# Altium PCB top.PcbDoc
Units mm, origin at the board's own origin, x right, y up, seen from the top; angles counter-clockwise.
Board outline 100 x 100 mm, 2 copper layers (Top Layer, Bottom Layer); 18 components, 10 nets, 131 pads, 1 vias.
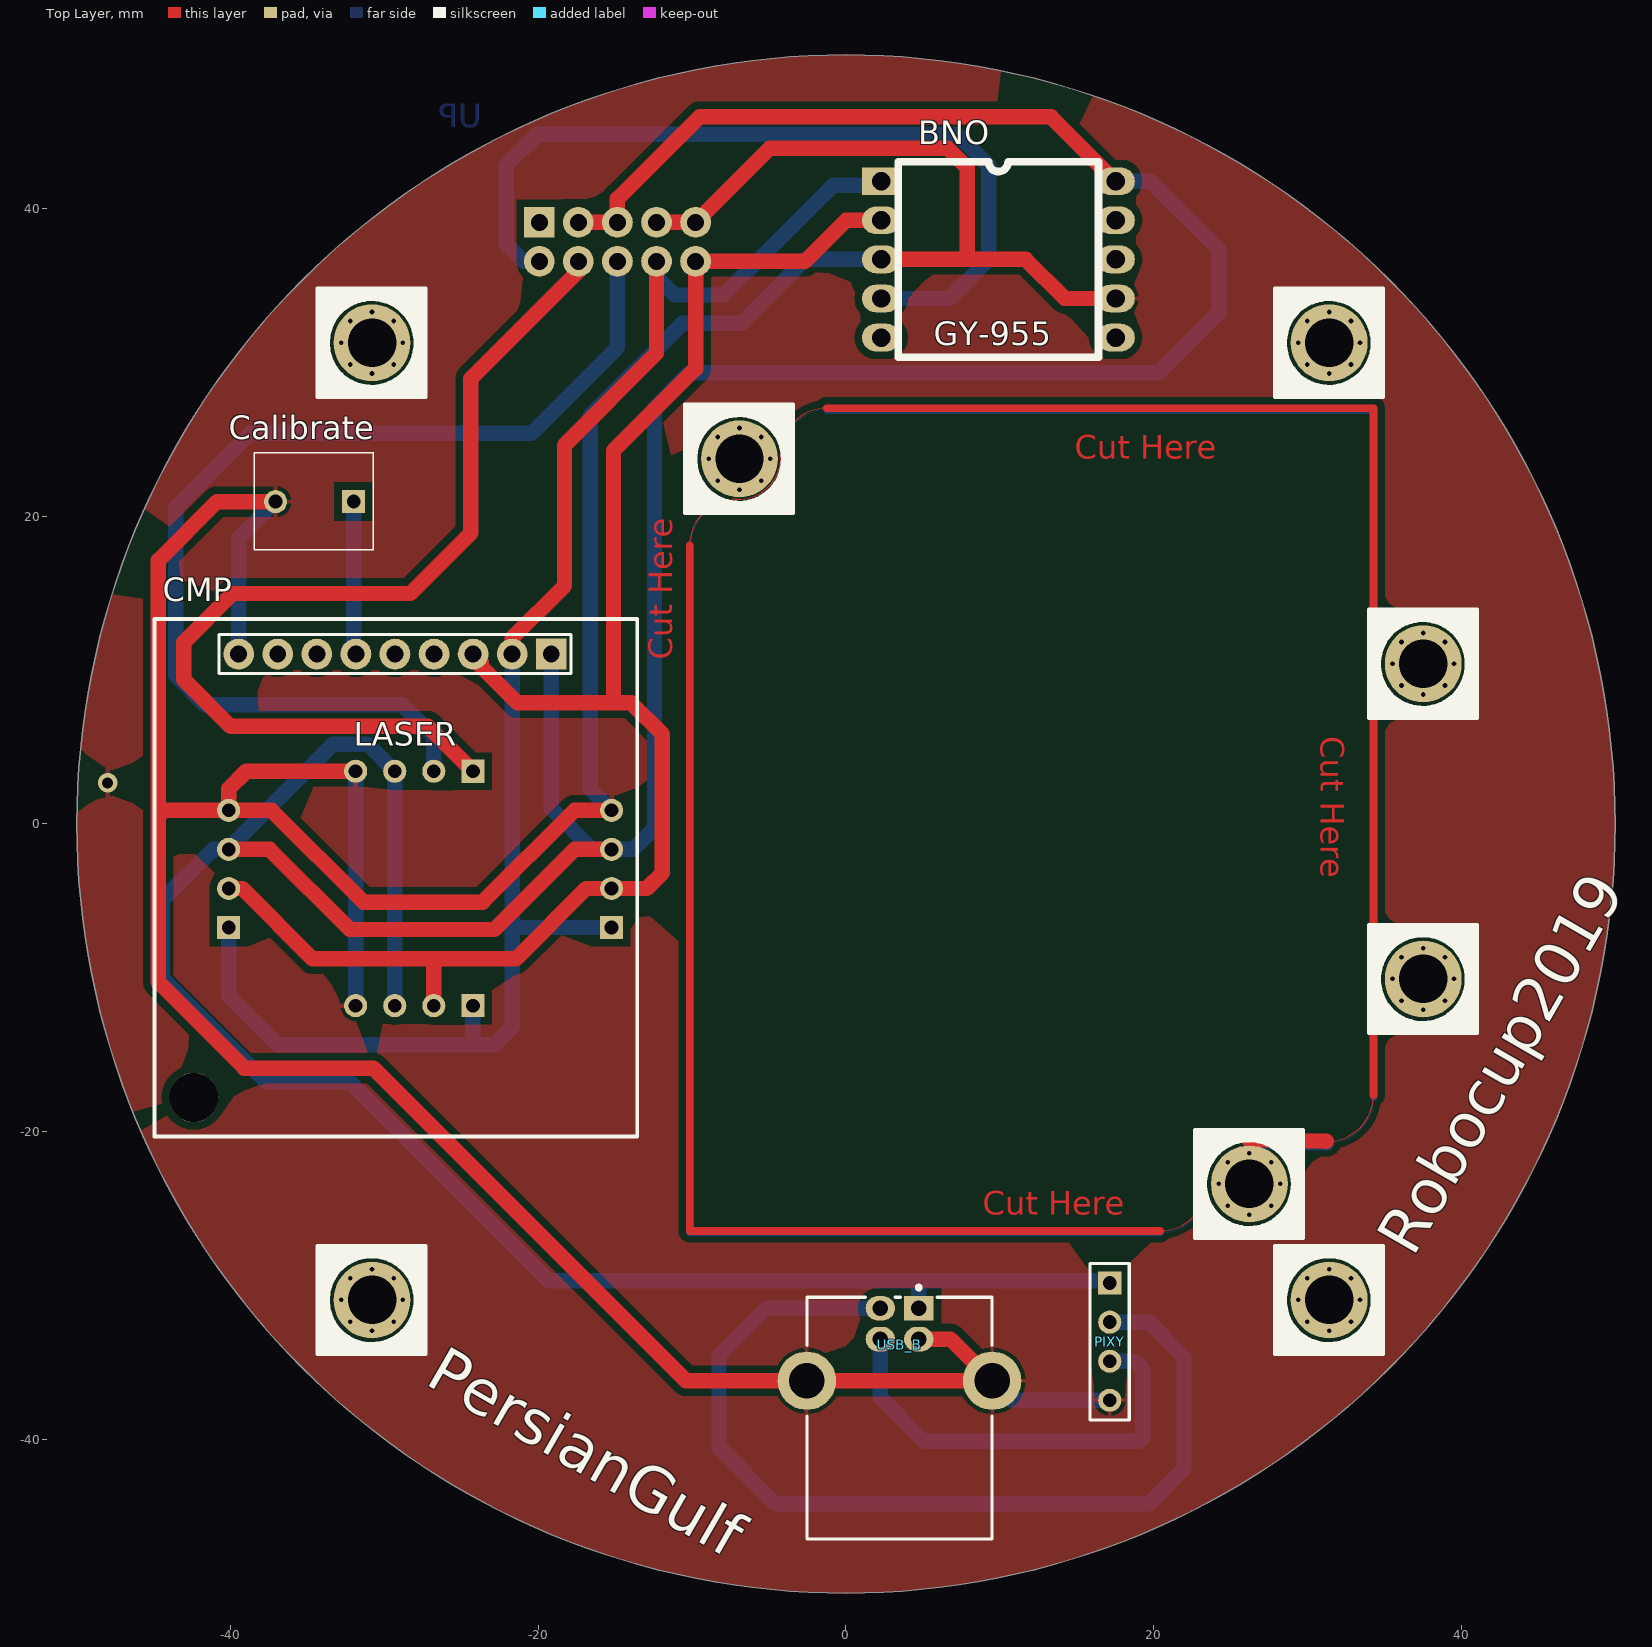
[diagram p0: Top Layer view]
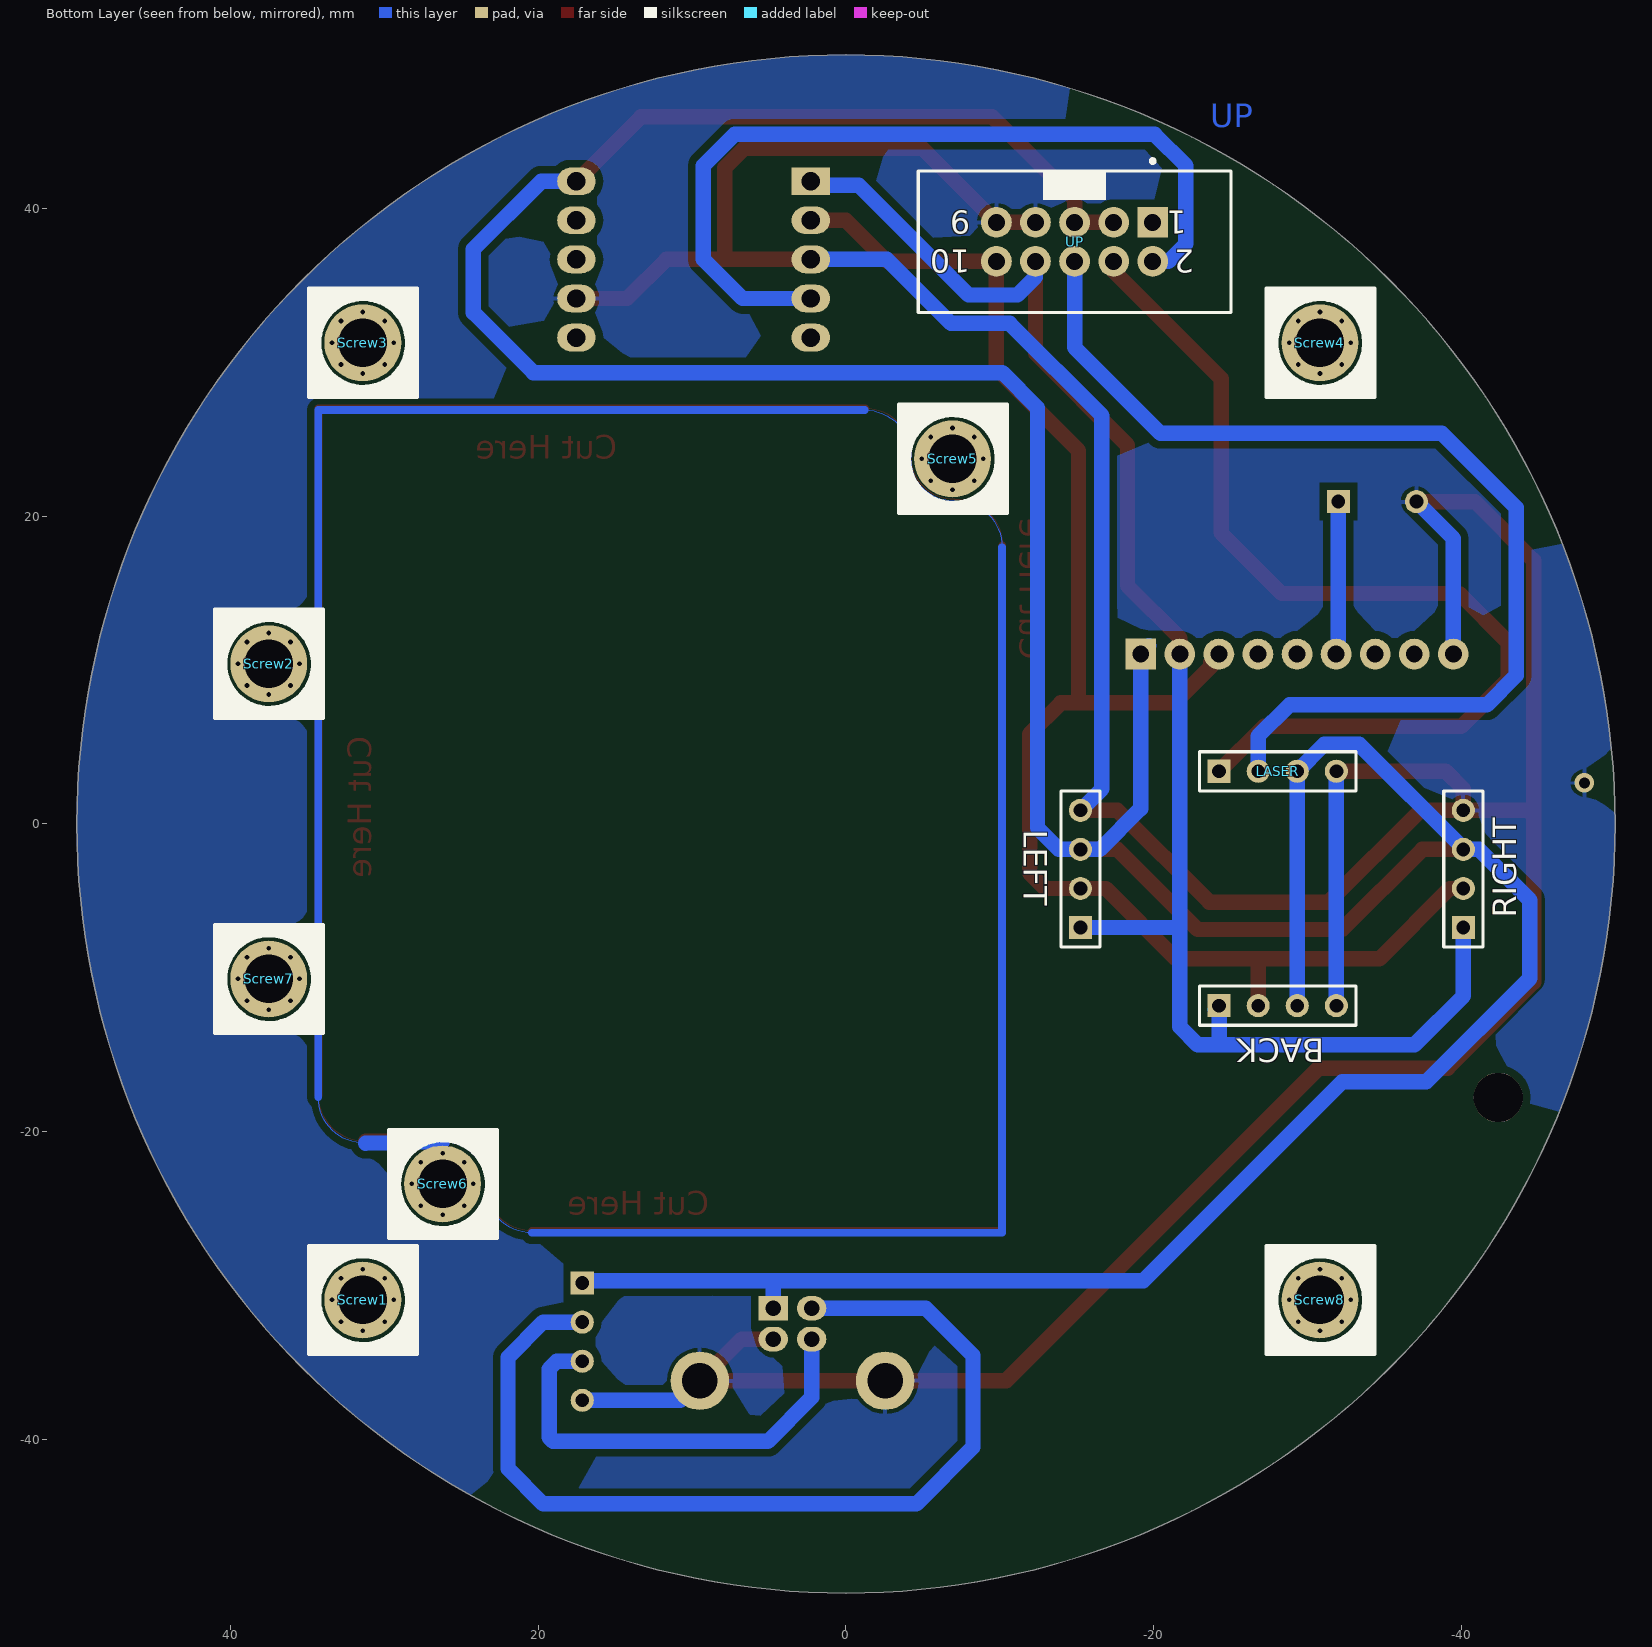
[diagram p1: Bottom Layer view, seen from below]
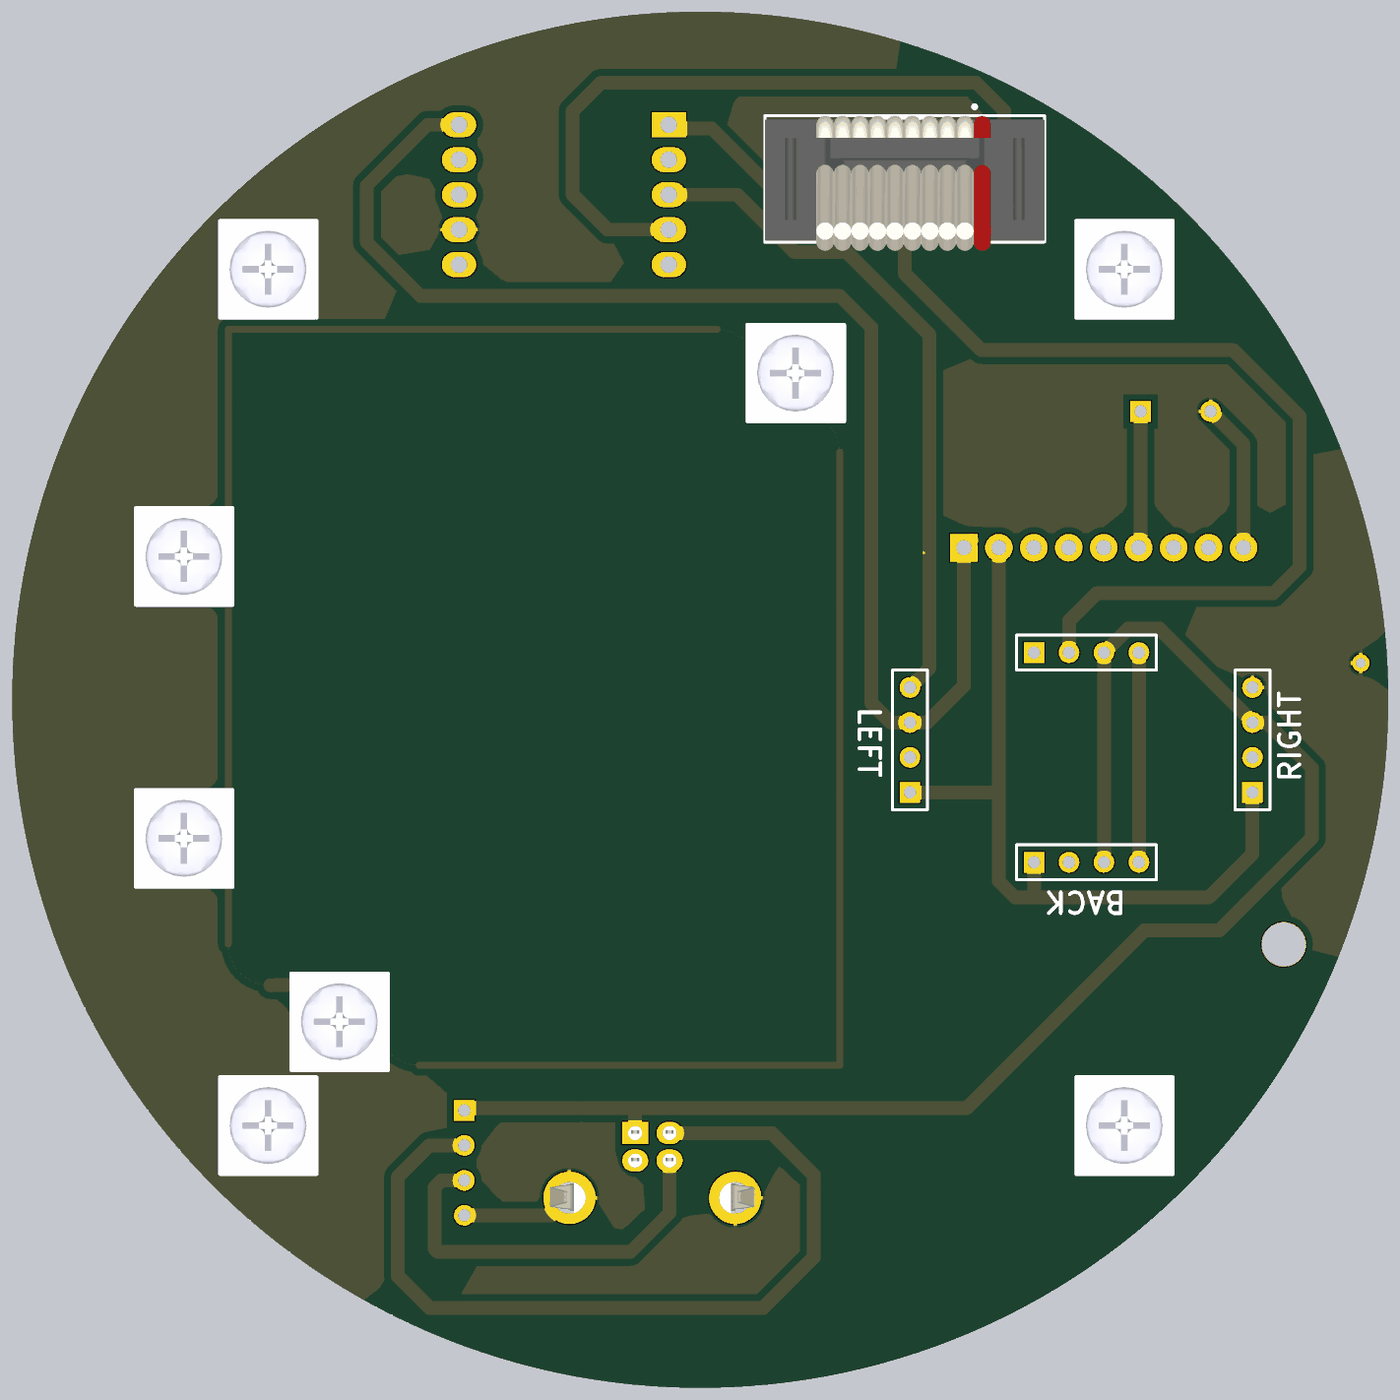
[diagram p2: 3D render of the assembled board from below, using the file's embedded part models]

## Layer stack, top to bottom
Top Solder: solder mask 0.0102, Solder Resist, Dk 3.5
Top Layer: signal copper 0.0356
Dielectric 1: dielectric 0.32, FR-4, Dk 4.8
Bottom Layer: signal copper 0.0356
Bottom Solder: solder mask 0.0102, Solder Resist, Dk 3.5

## Board outline
-50,0 ccw(c0,0) 0,-50 ccw(c0,0) 50,0 ccw(c0,0) 0,50 ccw(c0,0)

## Design rules (kind name [scope] priority, off if disabled: settings)
Clearance [All] p1: gap=0.5 ignorepadtopadclearanceinfootprint=FALSE
PolygonConnect [All] p1: connectstyle=Relief reliefconductorwidth=0.254 reliefentries=4 polygonreliefangle="90 Angle" airgapwidth=0.254
RoutingVias [All] p1: holewidth=0.711 width=1.27 viastyle="Through Hole" minholewidth=0.711 minwidth=1.27 maxholewidth=0.711 maxwidth=1.27
SolderMaskExpansion [All] p1: expansion=0.102
Width [All] p1: maxlimit=2 minlimit=0.5 preferedwidth=1 minimp=50.000000 maximp=50.000000 favimp=50.000000
30 further rules are at their usual default settings.

## Components (designator, comment, footprint, x,y, rotation, side; value= is the part's Value field where it differs from the comment)
BACK "LEFT" HDR1X4 -24.257,-11.811 r180 bottom
BNO "1" DIP10 1.016,41.783 r0 top locked
Calibrate "Push Button" "Push Button" -34.544,20.955 r90 top (schematic designator Button)
CMP "CMP03" CMP03 -28.813,-4.191 r0 top
LASER "LEFT" HDR1X4 -24.257,3.429 r180 bottom (schematic designator LAZER)
LEFT "LEFT" HDR1X4 -15.24,-6.731 r90 bottom
PIXY "Header 4" HDR1X4 17.145,-29.845 r270 top
RIGHT "LEFT" HDR1X4 -40.132,-6.731 r90 bottom
Screw1 "Screw" Screw 31.412,-30.941 r180 bottom locked
Screw2 "Screw" Screw 37.525,10.416 r180 bottom locked
Screw3 "Screw" Screw 31.412,31.285 r180 bottom locked
Screw4 "Screw" Screw -30.813,31.285 r180 bottom locked
Screw5 "Screw" Screw -6.925,23.741 r180 bottom locked
Screw6 "Screw" Screw 26.225,-23.397 r180 bottom locked
Screw7 "Screw" Screw 37.525,-10.072 r180 bottom locked
Screw8 "Screw" Screw -30.813,-30.941 r180 bottom locked
UP "IDC2x5" "IDC 2x5" -14.808,37.719 r270 bottom
USB_B "USB_B" USB_B.1 3.48,-33.84 r270 top

## Footprints (in the part's own frame and the unit in brackets; to place one, negate y for a bottom-side part, rotate by r counter-clockwise, add the part's x,y. Pads: shape width x height; smd on the part's side, far side on the other; paste and mask are expansions set on the pad)
CMP03 [mm]
  round 3.2 hole 3.2: 0(-13.589,-13.589)
  round 0 all layers, no hole: 0(12.573,14.859)
  rect 2x2 hole 1.1: 1(9.652,15.24)
  round 2 hole 1.1: 2(7.112,15.24) 3(4.572,15.24) 4(2.032,15.24) 5(-0.508,15.24) 6(-3.048,15.24) 7(-5.588,15.24) 8(-8.128,15.24) 9(-10.668,15.24)
  silkscreen extent -16.13,-16.13 15.24,17.53
DIP10 [mm]
  rect 2.5x1.8 hole 1.2: 1(1.27,0)
  oval 2.5x1.8 hole 1.2: 2(1.27,-2.54) 3(1.27,-5.08) 4(1.27,-7.62) 5(1.27,-10.16) 6(16.51,-10.16) 7(16.51,-7.62) 8(16.51,-5.08) 9(16.51,-2.54) 10(16.51,0)
  silkscreen extent 2.38,-11.43 15.4,1.27
HDR1X4 [mm] "Connector; Header; 4 Position"
  rect 1.5x1.5 hole 0.9: 1(0,0)
  round 1.5 hole 0.9: 2(2.54,0) 3(5.08,0) 4(7.62,0)
  silkscreen extent -1.27,-1.27 8.89,1.27
"IDC 2x5" [mm] "IDC 5x2"
  rect 2x2 hole 1.1: 1(-1.397,5.131)
  round 2 hole 1.1: 2(1.143,5.131) 3(-1.397,2.591) 4(1.143,2.591) 5(-1.397,0.051) 6(1.143,0.051) 7(-1.397,-2.489) 8(1.143,-2.489) 9(-1.397,-5.029) 10(1.143,-5.029)
  silkscreen extent -5.5,-10.11 4.47,10.21, body extent -4.73,-10.11 5.09,10.21, height 133.79
"Push Button" [mm]
  rect 1.5x1.5 hole 0.9: 1(0,-2.54)
  round 1.5 hole 0.9: 2(0,2.54)
  silkscreen extent -3.13,-3.81 3.19,3.94
Screw [mm]
  round 0.6 hole 0.3: S(-2,0) S(-1.414,-1.414) S(-1.414,1.414) S(0,-2) S(0,2) S(1.414,-1.414) S(1.414,1.414) S(2,0)
  round 5 hole 3.15 mask+0.1: S(0,0)
  silkscreen extent -3.49,-3.53 3.56,3.52, body extent -2.8,-2.8 2.8,2.8, height 3.88
USB_B.1 [mm]
  rect 1.6x1.9 hole 1: 1(-2.355,1.25)
  oval 1.6x1.9 hole 1: 2(-2.355,-1.25) 3(-0.355,-1.25) 4(-0.355,1.25)
  round 3.8 hole 2.3: 5(2.355,6.02) 6(2.355,-6.02)
  silkscreen extent -3.83,-6.02 12.64,6.02, body extent -3.86,-7.45 12.64,7.45, height 10.95

## Part data
BACK LASER LEFT RIGHT: library part "Header 4", "Header, 4-Pin", LatestRevisionDate=17-Jul-2002, LatestRevisionNote="Re-released for DXP Platform.", Publisher="Altium Limited"
BNO: library part Gy955
PIXY: "Header, 4-Pin", LatestRevisionDate=17-Jul-2002, LatestRevisionNote="Re-released for DXP Platform.", Publisher="Altium Limited"
UP: library part "IDC 2x5"
USB_B: "USB B", LatestRevisionDate=17-Jul-2002, LatestRevisionNote="Re-released for DXP Platform.", Publisher="Altium Limited"
Screw1 Screw2 Screw3 Screw4 Screw5 Screw6 Screw7 Screw8: LatestRevisionDate=17-Jul-2002, LatestRevisionNote="Re-released for DXP Platform.", Publisher="Altium Limited"

## Via types
v1: diameter 1.27, hole 0.711, Top Layer to Bottom Layer, 1 vias

## Nets (pads, with @x,y where several pads share a name; then routed paths per layer and width w, separated by ;. In a path a pad name is that pad's centre, name@x,y a point inside that pad or via, vN(x,y) a via of type N, cw(c..) or ccw(c..) an arc to the next point about the centre after c; other vN are vias at no path point)
Calibrate: Calibrate.1 CMP.6 | length 10
  Bottom Layer w1: Calibrate.1 -32.004,11.192 CMP.6
GND: BACK.4 BNO.3 BNO.7 Calibrate.2 CMP.9 LASER.4 LEFT.4 PIXY.4 RIGHT.4 UP.7 UP.9 USB_B.4 USB_B.5 USB_B.6 | length 281.4
  Top Layer w1: Calibrate.2 -40.894,20.955 -44.704,17.145 -44.704,0.508 ; LASER.4 -38.989,3.429 -40.132,2.286 RIGHT.4 ; LEFT.4 -17.653,0.889 -23.622,-5.08 -31.369,-5.08 -37.338,0.889 RIGHT.4 ; UP.7 UP.9 -4.953,43.942 6.604,43.942 7.874,42.672 7.874,36.703 ; BNO.3 7.874,36.703 ; USB_B.4 6.79,-33.485 USB_B.5 USB_B.6 -10.414,-36.195 -30.734,-15.875 -39.116,-15.875 -44.704,-10.287 -44.704,0.508 ; BNO.7 14.224,34.163 11.684,36.703 7.874,36.703 ; -44.704,0.508 -44.323,0.889 RIGHT.4
  Bottom Layer w1: CMP.9@-39.751,10.779 CMP.9 -39.481,18.558 Calibrate.2 ; BACK.4 LASER.4 ; LEFT.4 -16.637,2.286 -16.637,26.543 -10.638,32.542 -6.828,32.542 -2.667,36.703 BNO.3 ; USB_B.4@4.73,-33.681 USB_B.4 ; USB_B.5 10.77,-37.465 PIXY.4
  other v1: -48.006,2.667
NetPIXY_2: PIXY.2 USB_B.2 | length 63.4
  Bottom Layer w1: USB_B.2 -5.196,-31.485 -8.255,-34.544 -8.255,-40.513 -4.572,-44.196 19.685,-44.196 21.971,-41.91 21.971,-34.671 19.685,-32.385 PIXY.2
NetPIXY_3: PIXY.3 USB_B.3 | length 29
  Bottom Layer w1: USB_B.3 2.23,-37.282 5.08,-40.132 19.05,-40.132 19.304,-39.878 19.304,-35.433 18.796,-34.925 PIXY.3
RESET_BNO: BNO.4 UP.2 | length 55
  Bottom Layer w1: UP.2 -20.955,36.576 -22.098,37.719 -22.098,42.799 -20.066,44.831 7.239,44.831 9.271,42.799 9.271,36.703 6.731,34.163 BNO.4 ; BNO.4@2.286,33.909 BNO.4@2.413,33.909
SCL_COM_VCC: BACK.1 BNO.1 CMP.2 LEFT.1 RIGHT.1 UP.8 | length 106.9
  Top Layer w1: CMP.2 -21.701,12.081 -18.304,15.478 -18.304,24.622 -12.319,30.607 UP.8
  Bottom Layer w1: RIGHT.1 -40.132,-11.176 -36.957,-14.351 -24.384,-14.351 ; BACK.1@-24.003,-12.065 BACK.1 -24.257,-14.224 -24.384,-14.351 ; CMP.2 -21.701,-6.731 ; LEFT.1 -21.701,-6.731 ; UP.8 -12.319,35.56 -11.152,34.393 -7.961,34.393 -0.825,41.529 2.032,41.529 BNO.1 ; -24.384,-14.351 -22.86,-14.351 -21.701,-13.192 -21.701,-8.128 -21.701,-6.731
SCL_LAS_VCC: LASER.1 UP.4 | length 65.8
  Top Layer w1: LASER.1 -27.178,6.35 -40.005,6.35 -43.053,9.398 -43.053,11.811 -39.878,14.986 -28.321,14.986 -24.384,18.923 -24.384,28.956 -17.399,35.941 UP.4
SDA_COM_VCC: BACK.2 BNO.2 CMP.3 LEFT.2 RIGHT.2 UP.10 | length 103.2
  Top Layer w1: RIGHT.2 -39.243,-4.191 -34.671,-8.763 -26.543,-8.763 ; BACK.2 -26.797,-9.017 -26.543,-8.763 ; CMP.3 -23.701,10.509 -23.701,10.221 -21.354,7.874 -13.97,7.874 -11.938,5.842 -11.938,-3.175 -12.954,-4.191 LEFT.2 -16.891,-4.191 -21.463,-8.763 -26.543,-8.763 ; -15.113,8.128 -15.113,24.27 -9.779,29.604 UP.10 -2.667,36.576 0,39.243 BNO.2 BNO.2@2.429,39.243
SDA_LAS_VCC: LASER.2 UP.6 | length 70.2
  Bottom Layer w1: LASER.2 -26.797,5.715 -28.829,7.747 -41.656,7.747 -43.561,9.652 -43.561,20.574 -38.735,25.4 -20.447,25.4 -14.859,30.988 UP.6
VCC: BACK.3 BNO.10 CMP.1 LASER.3 LEFT.3 PIXY.1 RIGHT.3 UP.3 UP.5 USB_B.1 | length 279.8
  Top Layer w1: RIGHT.3 -37.465,-1.651 -32.258,-6.858 -22.86,-6.858 -17.653,-1.651 LEFT.3 ; UP.3 UP.5 -14.859,40.64 -9.525,45.974 13.335,45.974 BNO.10
  Bottom Layer w1: RIGHT.3@-40.165,-1.618 -33.367,5.179 -31.087,5.179 LASER.3 BACK.3 ; RIGHT.3 -41.148,-1.651 -44.45,-4.953 -44.45,-10.033 -37.719,-16.764 -32.258,-16.764 -19.337,-29.685 4.938,-29.685 ; CMP.1@-19.701,11.589 CMP.1 -19.161,1 -16.51,-1.651 LEFT.3 -13.843,-1.651 -12.446,-0.254 -12.446,27.051 -10.16,29.337 20.32,29.337 24.225,33.242 24.225,37.37 19.812,41.783 BNO.10 ; USB_B.1 4.73,-29.893 4.938,-29.685 ; 8.542,-29.685 4.938,-29.685 ; 8.763,-29.685 16.985,-29.685 PIXY.1
pads on no net: BNO.5 BNO.6 BNO.8 BNO.9 CMP.0 CMP.4 CMP.5 CMP.7 CMP.8 Screw1.S Screw2.S Screw3.S Screw4.S Screw5.S Screw6.S Screw7.S Screw8.S UP.1
copper on no net: | length 753.9
  Top Layer w0.013: -7.069,21.111 ccw(c-7.16,18.113) -10.16,18.113 cw(c-7.16,18.113) -7.069,21.111 ; -7.069,21.111 ccw(c-6.985,23.86) -4.236,23.944 ; -7.069,21.111 ccw(c-6.985,23.86) -4.236,23.944 ; -4.236,23.944 cw(c-1.238,24.035) -1.238,27.035 ccw(c-1.238,24.035) -4.236,23.944 ; 23.416,-23.362 cw(c20.418,-23.453) 20.418,-26.453 ccw(c20.418,-23.453) 23.416,-23.362 ; 23.416,-23.362 cw(c26.165,-23.278) 26.222,-20.529 ccw(c26.165,-23.278) 23.416,-23.362 ; 31.228,-20.632 ccw(c31.29,-17.633) 34.29,-17.633 cw(c31.29,-17.633) 31.228,-20.632
  Top Layer w0.5: 26.222,-20.529 31.228,-20.632 ; -10.16,-26.453 -10.16,18.113 -10.16,-26.453 ; -10.16,-26.453 20.418,-26.453 -10.16,-26.453 ; 34.29,27.035 34.29,-17.633 34.29,27.035 ; 34.29,27.035 -1.238,27.035 34.29,27.035
  Top Layer w1: 26.222,-20.529 31.228,-20.632
  Bottom Layer w0.013: -7.056,20.992 ccw(c-6.972,23.741) -4.224,23.825 ; -7.056,20.992 ccw(c-7.147,17.994) -10.147,17.994 cw(c-7.147,17.994) -7.056,20.992 ; -7.056,20.992 ccw(c-6.972,23.741) -4.224,23.825 ; -4.224,23.825 cw(c-1.225,23.916) -1.225,26.916 ccw(c-1.225,23.916) -4.224,23.825 ; 23.429,-23.481 cw(c20.43,-23.572) 20.43,-26.572 ccw(c20.43,-23.572) 23.429,-23.481 ; 23.429,-23.481 cw(c26.178,-23.397) 26.235,-20.648 ccw(c26.178,-23.397) 23.429,-23.481 ; 31.241,-20.751 ccw(c31.303,-17.752) 34.303,-17.752 cw(c31.303,-17.752) 31.241,-20.751
  Bottom Layer w0.5: 26.235,-20.648 31.241,-20.751 ; -10.147,-26.572 20.43,-26.572 -10.147,-26.572 ; -10.147,-26.572 -10.147,17.994 -10.147,-26.572 ; 34.303,26.916 -1.225,26.916 34.303,26.916 ; 34.303,26.916 34.303,-17.752 34.303,26.916
  Bottom Layer w1: 26.235,-20.648 31.241,-20.751

## Polygon pours and split planes (outlines as drawn)
GND on Bottom Layer "GND_L02_P002" (solid, remove dead copper, pour order 2): -50,0 ccw(c0,0) 0,-50 ccw(c0,0) 50,0 ccw(c0,0) 0,50 ccw(c0,0)
GND on Top Layer "GND_L01_P003" (solid, remove dead copper, pour order 3): -50,0 ccw(c0,0) 0,-50 ccw(c0,0) 50,0 ccw(c0,0) 0,50 ccw(c0,0)

## Other copper
Top Layer:
  text "Cut Here" at 14.859,23.749 h1.52
  text "Cut Here" at -11.303,10.668 h1.52 r90
  text "Cut Here" at 30.861,5.715 h1.52 r270
  text "Cut Here" at 8.89,-25.397 h1.52

## Silkscreen, mask and mechanical layers (free items; w line width, h text height)
Top Overlay:
  text "Robocup2019" at 37.719,-28.702 h5 r60
  text "PersianGulf" at -27.94,-37.211 h5 r330
Drill Guide:
  circle w0.013: c-6.972,23.741 r1.5
  circle w0.013: c-6.972,23.741 r1.5
  circle w0.013: c26.178,-23.397 r1.5
  circle w0.013: c26.178,-23.397 r1.5
  lines w0.013: -7.056,20.992 ccw(c-7.147,17.994) -10.147,17.994 cw(c-7.147,17.994) -7.056,20.992 ; -7.056,20.992 ccw(c-6.972,23.741) -4.224,23.825 ; -7.056,20.992 ccw(c-6.972,23.741) -4.224,23.825 ; -4.224,23.825 cw(c-1.225,23.916) -1.225,26.916 ccw(c-1.225,23.916) -4.224,23.825 ; 23.429,-23.481 cw(c20.43,-23.572) 20.43,-26.572 ccw(c20.43,-23.572) 23.429,-23.481 ; 23.429,-23.481 cw(c26.178,-23.397) 26.235,-20.648 ccw(c26.178,-23.397) 23.429,-23.481 ; 31.241,-20.751 ccw(c31.303,-17.752) 34.303,-17.752 cw(c31.303,-17.752) 31.241,-20.751
  lines w0.5: 26.235,-20.648 31.241,-20.751 ; -10.147,-26.572 -10.147,17.994 -10.147,-26.572 ; -10.147,-26.572 20.43,-26.572 -10.147,-26.572 ; 34.303,26.916 34.303,-17.752 34.303,26.916 ; 34.303,26.916 -1.225,26.916 34.303,26.916
  lines w1: 26.235,-20.648 31.241,-20.751
Mechanical 1:
  circle w0.013: c37.478,-10.072 r1.5
  circle w0.013: c37.478,10.416 r1.5
  circle w0.013: c31.365,31.285 r1.5
  circle w0.013: c-30.86,31.285 r1.5
  circle w0.013: c-30.86,-30.941 r1.5
  circle w0.013: c31.365,-30.941 r1.5
  circle w0.013: c0,0 r50

## Text inside footprints (layer, text, board x,y; h text height)
BNO: Top Overlay "GY-955" at 5.715,31.115 h1.52
UP: Bottom Overlay "1" at -22.147,39.866 h1.5 r180; Bottom Overlay "10" at -8.071,37.326 h1.5 r180; Bottom Overlay "9" at -8.071,39.866 h1.5 r180; Bottom Overlay "2" at -22.647,37.326 h1.5 r180